# EAGLE board schematic (EAGLE 9.5.2)
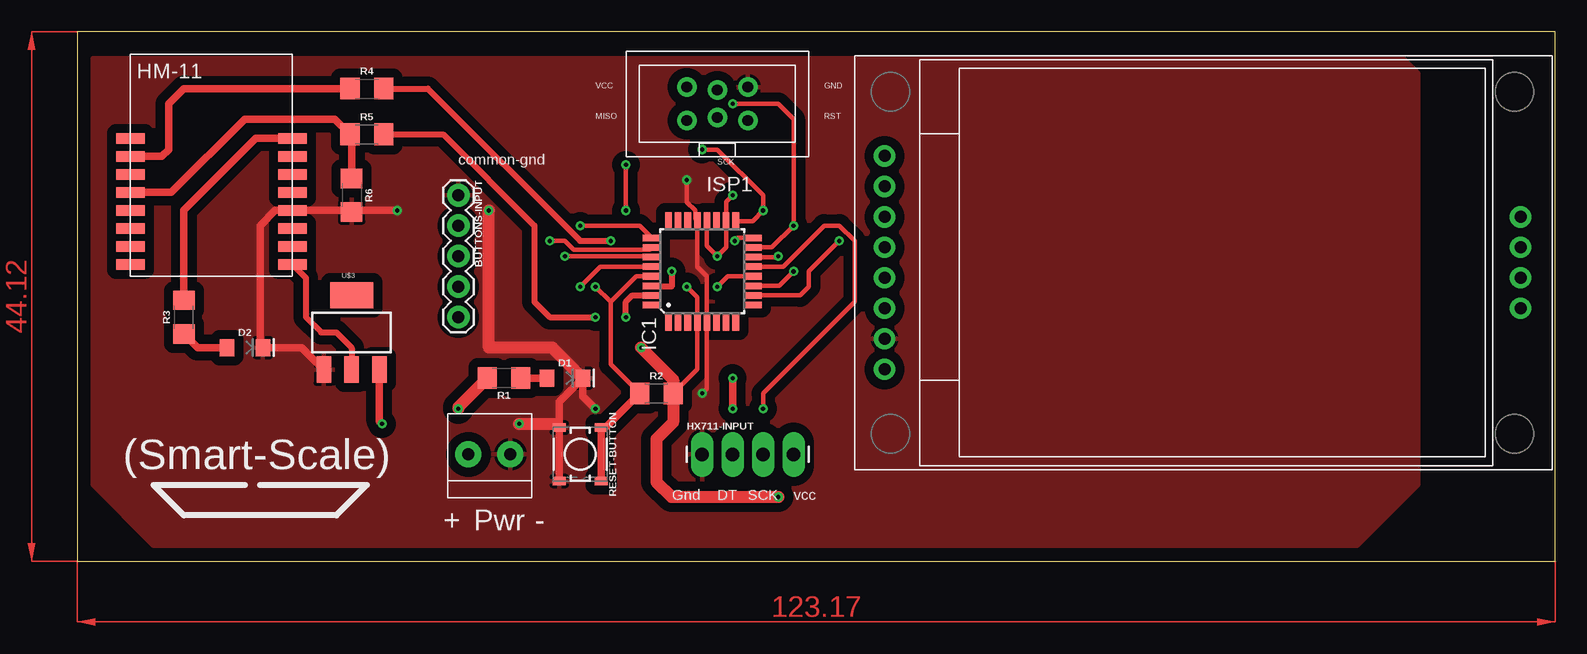
[diagram p0: board, top side]
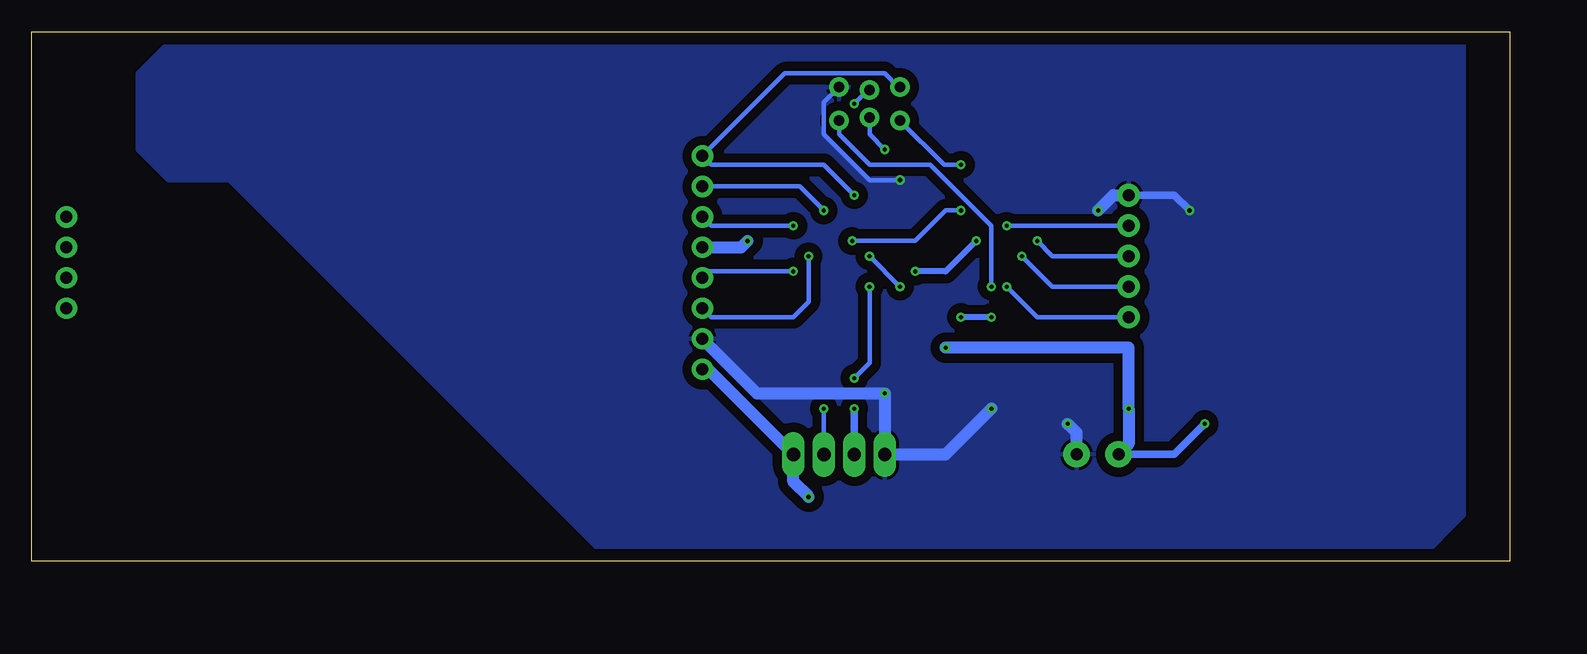
[diagram p1: board, bottom side, seen from below]

Size 123.17 x 44.12 mm. Coordinates in mm from the lower left corner, seen from the top.
Outline: 0,0 123.17,0 123.17,44.12 0,44.12 0,0
Copper layers (1*16): Top 0.035mm / dielectric 1.5mm / Bottom 0.035mm
Design rules "default": minimum track width 6mil, minimum drill 0.35mm, track to track 6mil, track to pad 6mil, pad to pad 6mil, via to via 6mil, smd to smd 6mil, copper to edge 40mil, drill to drill 6mil, minimum pad ring 10mil, minimum via ring 8mil, stop-mask expansion 4mil, vias tented up to drill 0mil, thermal gap 10mil

## Footprints (pad centres in the part's own frame; a part is rotated, then mirrored left to right if it is on the bottom)
1X05 = drill 1.016 pad 1.88: 1 0,0; 2 2.54,0; 3 5.08,0; 4 7.62,0; 5 10.16,0
LED-1206 = smd 1.2 x 1.4: A -1.5,0; C 1.5,0
1X04_LONGPADS = drill 1.118 pad 1.88 long: 1 0,0; 2 2.54,0; 3 5.08,0; 4 7.62,0
QFP32_7X7_0.80 = smd 1.5 x 0.55: 1 -4.2,2.8; 2 -4.2,2; 3 -4.2,1.2; 4 -4.2,0.4; 5 -4.2,-0.4; 6 -4.2,-1.2; 7 -4.2,-2; 8 -4.2,-2.8; 17 4.2,-2.8; 18 4.2,-2; 19 4.2,-1.2; 20 4.2,-0.4; 21 4.2,0.4; 22 4.2,1.2; 23 4.2,2; 24 4.2,2.8 | smd 0.55 x 1.5: 9 -2.8,-4.2; 10 -2,-4.2; 11 -1.2,-4.2; 12 -0.4,-4.2; 13 0.4,-4.2; 14 1.2,-4.2; 15 2,-4.2; 16 2.8,-4.2; 25 2.8,4.2; 26 2,4.2; 27 1.2,4.2; 28 0.4,4.2; 29 -0.4,4.2; 30 -1.2,4.2; 31 -2,4.2; 32 -2.8,4.2
AVRISP-BOX = drill 0.9 pad 1.626: 1 -1.397,2.54; 2 1.397,2.54; 3 -1.143,0; 4 1.143,0; 5 -1.397,-2.54; 6 1.397,-2.54
1X2-3.5MM = drill 1 pad 2.184: 1 1.8,0; 2 -1.7,0
1206 = smd 1.6 x 1.8: 1 -1.4,0; 2 1.4,0
TACTILE_SWITCH_SMD_4.5MM = smd 0.7 x 1.1: 1 2.225,1.75; 2 2.225,-1.75; 3 -2.225,-1.75; 4 -2.225,1.75
1.8"_TFT = drill 1 pad 1.778: P$3 55.5,21.05; P$4 55.5,18.52; P$5 55.5,15.98; P$6 55.5,13.44; P$9 2.5,26.14; P$10 2.5,23.6; P$11 2.5,21.06; P$12 2.5,18.52; P$13 2.5,15.98; P$14 2.5,13.44; P$15 2.5,10.9; P$16 2.5,8.36
HM-11 = smd 2.4 x 0.9: GND 6.5,0; NC@5 -7,0; NC@6 -7,-1.5; NC@7 -7,-3; NC@8 -7,-4.5; NC@10 6.5,-3; PIO0 6.5,6; PIO1 6.5,4.5; PIO2 6.5,3; PIO3 6.5,1.5; RESETB 6.5,-1.5; UART_CTS -7,3; UART_RTS -7,6; UART_RX -7,1.5; UART_TX -7,4.5; VCC 6.5,-4.5
SOT223 = smd 1.219 x 2.235: 1 -2.311,-3.099; 2 0,-3.099; 3 2.311,-3.099 | smd 3.6 x 2.2: 4 0,3.099

## Placement (x,y rotation side)
BUTTONS-INPUT  [1X05]  31.75,30.48 270 top
D1  pwr_led  [LED-1206]  40.64,15.24 0 top
D2  pwr_led  [LED-1206]  13.97,17.78 0 top
HX711-INPUT  [1X04_LONGPADS]  52.07,8.89 0 top
IC1  ATMEGA328PB-AN  [QFP32_7X7_0.80]  52.07,24.13 90 top
ISP1  AVRISP-BOX  [AVRISP-BOX]  53.34,38.1 90 top
PWR  1X2-3.5MM  [1X2-3.5MM]  34.29,8.89 0 top
R1  470  [1206]  35.56,15.24 180 top
R2  10k  [1206]  48.26,13.97 0 top
R3  470  [1206]  8.89,20.32 90 top
R4  1k  [1206]  24.13,39.37 0 top
R5  1k  [1206]  24.13,35.56 0 top
R6  2k  [1206]  22.86,30.48 270 top
RESET-BUTTON  MOMENTARY-SWITCH-SPST-SMD-4.5MM  [TACTILE_SWITCH_SMD_4.5MM]  41.91,8.89 270 top
U$1  1.8"_TFT  [1.8"_TFT]  64.77,7.62 0 top
U$2  HM-11  [HM-11]  11.43,29.21 0 top
U$3  V_REG_LD1117VXXLD1117-SMD  [SOT223]  22.86,19.05 0 top

## Library data of the parts
BUTTONS-INPUT = SparkFun-Connectors
D1 D2 = SparkFun-LED
HX711-INPUT = SparkFun-Connectors; PROD_ID: CONN-09696
IC1 = atmel
ISP1 PWR = adafruit
R1-R6 = SparkFun-Resistors
RESET-BUTTON = SparkFun-Switches; PROD_ID: SWCH-09213
U$1 = tft_1.8_1.44_oled_0.96
U$2 = hm-11
U$3 = SparkFun-IC-Power; PROD_ID: VREG-13917

## Nets
A0: IC1.10 U$1.P$12
BT_RX: IC1.31 R5.2
BT_TX: IC1.30 R4.2
GND: BUTTONS-INPUT.1 D1.C D2.C HX711-INPUT.1 IC1.5 IC1.21 ISP1.6 PWR.1 R6.2 RESET-BUTTON.2 RESET-BUTTON.3 U$1.P$15 U$2.GND U$3.1
LCD_RST: IC1.11 U$1.P$13
MISO: IC1.16 ISP1.1
MOSI: IC1.15 ISP1.4 U$1.P$11
N$1: U$2.VCC U$3.2
N$2: BUTTONS-INPUT.5 IC1.28
N$3: D1.A R1.1
N$4: BUTTONS-INPUT.4 IC1.27
N$5: BUTTONS-INPUT.3 IC1.26
N$6: BUTTONS-INPUT.2 IC1.25
N$7: HX711-INPUT.2 IC1.12
N$8: HX711-INPUT.3 IC1.13
N$9: R3.2 U$2.PIO0
N$10: D2.A R3.1
N$11: R4.1 U$2.UART_TX
N$12: R5.1 R6.1 U$2.UART_RX
RST: IC1.29 ISP1.5 R2.1 RESET-BUTTON.1 RESET-BUTTON.4
SCK: IC1.17 ISP1.3 U$1.P$10
SS: IC1.14 U$1.P$14
VCC: HX711-INPUT.4 IC1.4 IC1.18 IC1.20 ISP1.2 PWR.2 R1.2 R2.2 U$1.P$9 U$1.P$16 U$3.3

## Tracks (layer width: path | path; a pad name or v marks a point on that pad's centre or on a via)
A0  (via drill 0.35)
  Top 0.381: v63.5,26.67 60.96,24.13 60.96,22.86 60.23,22.13 IC1.10
  Bottom 1.016: U$1.P$12 64.03,26.14 v63.5,26.67
BT_RX  (via drill 0.35)
  Top 0.508: R5.2 30.48,35.56 38.1,27.94 38.1,21.59 39.37,20.32 v43.18,20.32 | v45.72,20.32 45.72,21.59 46.26,22.13 IC1.31
  Bottom 0.508: v43.18,20.32 v45.72,20.32
BT_TX  (via drill 0.35)
  Top 0.508: R4.2 29.21,39.37 41.91,26.67 v44.45,26.67 | v49.53,24.13 49.53,22.86 47.94,22.86 IC1.30
  Bottom 0.508: v44.45,26.67 46.99,24.13 v49.53,24.13
GND  (via drill 0.35)
  Top 0.381: v52.07,13.97 52.47,14.37 IC1.5 52.47,23.73 51.67,24.53 IC1.21 51.49,28.51 51.49,29.22 50.8,29.91 v50.8,31.75
  Top 0.635: RESET-BUTTON.2 RESET-BUTTON.3 40.16,13.26 D1.C 42.14,13.74 v43.18,12.7 | U$3.1 18.72,17.78 D2.C 15.24,18.01 15.24,27.94 16.51,29.21 U$2.GND 22.73,29.21 R6.2 22.99,29.21 v26.67,29.21
  Top 1.016: v36.83,11.43 39.84,11.43 RESET-BUTTON.3 | D1.C 39.6,17.78 34.29,17.78 v34.29,29.21
  Bottom 0.381: ISP1.6 57.15,38.23 57.15,35.56 53.34,31.75 v50.8,31.75
  Bottom 0.635: v26.67,29.21 27.94,30.48 BUTTONS-INPUT.1
  Bottom 1.016: v43.18,12.7 46.99,8.89 HX711-INPUT.1 v52.07,13.97 62.72,13.97 U$1.P$15 | PWR.1 36.09,10.69 v36.83,11.43 | v34.29,29.21 33.02,30.48 BUTTONS-INPUT.1
  pour Top (isolate 0.762): 1.27,41.91 1.27,6.35 6.35,1.27 106.68,1.27 111.76,6.35 111.76,40.64 110.49,41.91
  pour Bottom (isolate 0.762): 3.81,43.18 3.81,3.81 7.62,0 74.93,0 106.68,31.75 111.76,31.75 114.3,34.29 114.3,40.64 111.76,43.18
LCD_RST  (via drill 0.35)
  Top 0.381: IC1.11 58.49,22.93 v59.69,24.13
  Bottom 0.381: v59.69,24.13 66.74,24.13 U$1.P$13
MISO  (via drill 0.35)
  Top 0.381: v54.79,26.67 55.05,26.93 IC1.16 | v45.72,33.02 v45.72,29.21
  Bottom 0.381: v54.79,26.67 49.53,26.67 46.99,29.21 v45.72,29.21 | ISP1.1 47.12,33.02 v45.72,33.02
MOSI  (via drill 0.35)
  Top 0.381: IC1.15 57.88,26.13 v59.69,27.94 59.69,36.83 58.42,38.1 v54.61,38.1
  Bottom 0.381: U$1.P$11 66.53,27.94 v59.69,27.94 | ISP1.4 53.47,39.24 v54.61,38.1
N$1
  Top 0.508: U$2.VCC 19.05,23.59 19.05,20.32 20.32,19.05 21.59,19.05 22.86,17.78 U$3.2
N$2  (via drill 0.35)
  Top 0.381: v41.91,22.86 43.58,24.53 IC1.28
  Bottom 0.381: BUTTONS-INPUT.5 39.37,20.32 v41.91,22.86
N$3
  Top 0.635: R1.1 D1.A
N$4  (via drill 0.35)
  Top 0.381: v40.64,25.4 47.8,25.4 IC1.27
  Bottom 0.381: BUTTONS-INPUT.4 38.1,22.86 v40.64,25.4
N$5  (via drill 0.35)
  Top 0.381: v39.37,26.67 40.64,26.67 41.38,25.93 46.96,25.93 46.98,25.95 47.69,25.95 IC1.26
  Bottom 0.381: BUTTONS-INPUT.3 38.1,25.4 v39.37,26.67
N$6  (via drill 0.35)
  Top 0.381: v41.91,27.94 46.86,27.94 IC1.25
  Bottom 0.381: BUTTONS-INPUT.2 v41.91,27.94
N$7  (via drill 0.35)
  Top 0.381: v53.34,22.86 54.21,23.73 IC1.12
  Top 0.635: v54.61,12.7 v54.61,15.24
  Bottom 0.381: v54.61,15.24 53.34,16.51 v53.34,22.86
  Bottom 0.635: HX711-INPUT.2 v54.61,12.7
N$8  (via drill 0.35)
  Top 0.381: IC1.13 58.82,24.53 62.23,27.94 63.5,27.94 64.77,26.67 64.77,21.59 57.15,13.97 v57.15,12.7
  Bottom 0.381: v57.15,12.7 HX711-INPUT.3
N$9
  Top 0.635: U$2.PIO0 14.89,35.21 8.89,29.21 R3.2
N$10
  Top 0.635: D2.A 10.03,17.78 R3.1
N$11
  Top 0.635: U$2.UART_TX 7.04,33.71 7.62,34.29 7.62,38.1 8.89,39.37 R4.1
N$12
  Top 0.635: R6.1 22.86,35.43 R5.1 21.46,36.83 13.97,36.83 7.85,30.71 U$2.UART_RX
RST  (via drill 0.35)
  Top 0.381: IC1.29 46.59,23.73 44.45,21.59 | R2.1 44.45,16.38 44.45,21.59 | v43.18,22.86 44.45,21.59
  Top 0.635: RESET-BUTTON.1 RESET-BUTTON.4 44.01,11.12 R2.1
  Bottom 0.381: v43.18,22.86 43.18,27.94 48.26,33.02 53.34,33.02 55.88,35.56 ISP1.5
SCK  (via drill 0.35)
  Top 0.381: IC1.17 56.27,28.33 v57.15,29.21 57.15,30.48 53.34,34.29 v52.07,34.29
  Bottom 0.381: U$1.P$10 59.16,31.22 v57.15,29.21 | ISP1.3 53.34,35.56 v52.07,34.29
SS  (via drill 0.35)
  Top 0.381: IC1.14 58.35,25.33 v58.42,25.4
  Bottom 0.381: v58.42,25.4 58.42,21.59 59.69,20.32 66.53,20.32 U$1.P$14
VCC  (via drill 0.35)
  Top 0.381: R2.2 51.67,15.98 IC1.4 51.67,21.99 v50.8,22.86 | IC1.20 52.47,26.27 v53.34,25.4 54.07,26.13 IC1.18 54.07,29.94 v54.61,30.48
  Top 0.635: v25.4,11.43 25.17,11.66 U$3.3
  Top 1.016: R1.2 31.75,12.83 v31.75,12.7 | v46.99,17.78 49.66,15.11 R2.2 49.66,11.56 48.26,10.16 48.26,6.6 49.53,5.33 v58.42,5.33
  Bottom 0.381: v50.8,22.86 v53.34,25.4 | v54.61,30.48 57.15,33.02 66.53,33.02 U$1.P$9 60.39,40.64 56.37,40.64 56.36,40.65 52.08,40.65 50.93,39.5 ISP1.2
  Bottom 0.635: PWR.2 27.94,8.89 v25.4,11.43
  Bottom 1.016: PWR.2 31.75,9.73 v31.75,12.7 31.75,17.78 v46.99,17.78 | v58.42,5.33 59.69,6.6 HX711-INPUT.4 66.78,15.98 U$1.P$16
(copper drawn outside any net)
  shapes: Top area x2

## Text on the board
tPlace: VCC | GND | MISO | RST | common-gnd | SCK | (Smart-Scale) | Gnd | DT | SCK | vcc | + | Pwr | -